# Altium PCB MAGI'sUART.PcbDoc
Units mil, origin at the board's own origin, x right, y up, seen from the top; angles counter-clockwise.
Board outline 6000 x 4000 mil, 2 copper layers (Top Layer, Bottom Layer); 19 components, 18 nets, 93 pads, 17 vias.
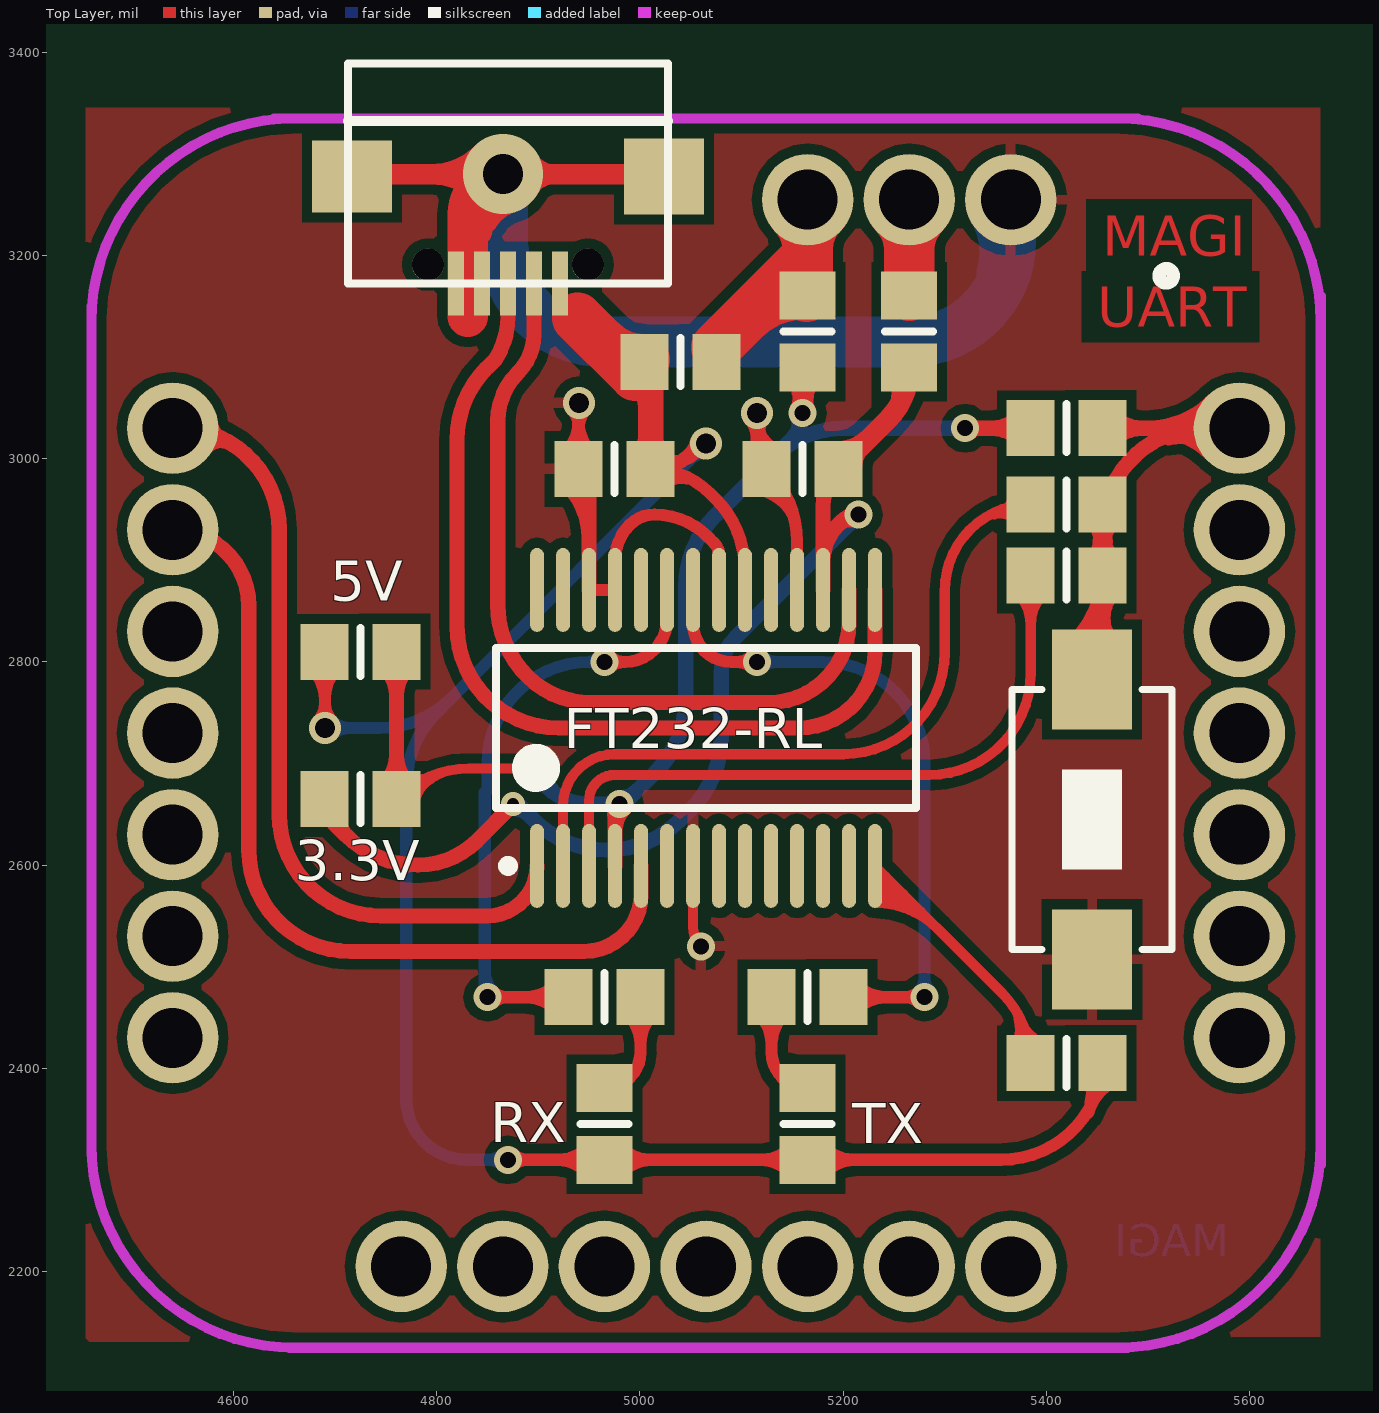
[diagram p0: Top Layer view]
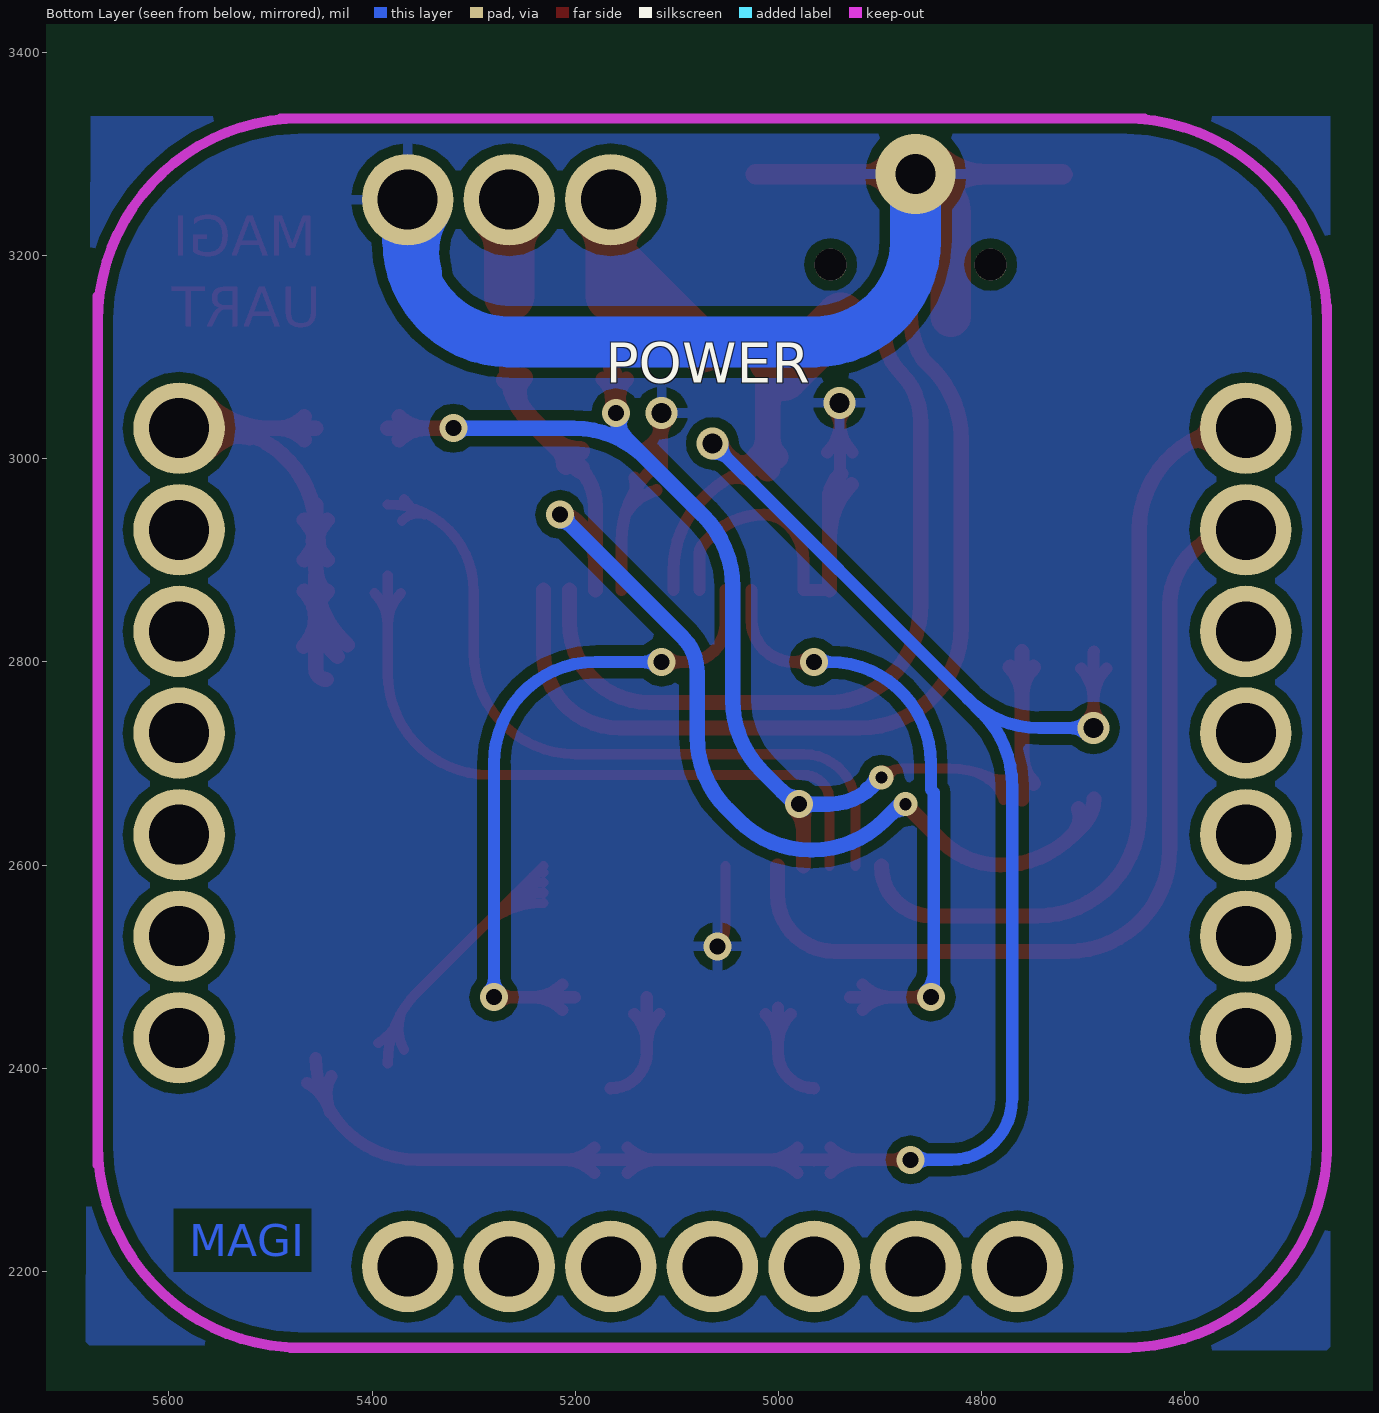
[diagram p1: Bottom Layer view, seen from below]

## Layer stack, top to bottom
Top Solder: solder mask 0.4, Solder Resist, Dk 3.5
Top Layer: signal copper 1.4
Dielectric1: dielectric 12.6, FR-4, Dk 4.8
Bottom Layer: signal copper 1.4
Bottom Solder: solder mask 0.4, Solder Resist, Dk 3.5

## Board outline
1000,1000 7000,1000 7000,5000 1000,5000

## Design rules (kind name [scope] priority, off if disabled: settings)
Clearance [All] p1: gap=10
PolygonConnect [All] p1: connectstyle=Relief reliefconductorwidth=10 reliefentries=4 polygonreliefangle="90 Angle" airgapwidth=10
RoutingVias [All] p1: holewidth=10 width=50 viastyle="Through Hole" minholewidth=1 minwidth=1 maxholewidth=280 maxwidth=500
SolderMaskExpansion [All] p1: expansion=4
Width [All] p1: maxlimit=50 minlimit=6 preferedwidth=20
29 further rules are at their usual default settings.

## Classes and differential pairs
component class MAGI'sCOM: C1 C2 C3 J2 LED1 LED2 R1 R2 R3 R4 R5 R6 R7 R8 R9 ""

## Components (designator, comment, footprint, x,y, rotation, side; value= is the part's Value field where it differs from the comment)
C1 "CAPACITOR POL" 6-0805_N 5160,2990 r180 top
C2 "CAPACITOR POL" 6-0805_N 4975,2990 r180 top
C3 "100nf" 6-0805_n 5420,2955 r0 top
J2 "MAGI-M8" MAGI-M8 5065,2730 r0 top
J3 "CON2" SW-1-SMD 5445,2645 r0 top
LED1 "LED_1" 6-0805_N 4965,2345 r90 top
LED2 "LED_1" 6-0805_N 5165,2345 r90 top
R1 "RES1" 6-0805_n 4965,2470 r0 top
R2 "RES1" 6-0805_n 5165,2470 r180 top
R3 "RES1" 6-0805_N 4725,2810 r180 top
R4 "RES1" 6-0805_N 4725,2665 r180 top
R5 "RES1" 6-0805_N 5420,2405 r0 top
R6 "10K" 6-0805_N 5420,3030 r180 top
R7 "10K" 6-0805_N 5040,3095 r180 top
R8 "0" 6-0805_N 5165,3125 r270 top
R9 "0" 6-0805_N 5265,3125 r270 top
R10 "100" 6-0805_N 5420,2885 r180 top
U1 "FT232RL-Tray" SSOP-28_N 5065,2735 r90 top
U2 "USB" MicroUSB 4870,3195 r0 top

## Footprints (in the part's own frame and the unit in brackets; to place one, negate y for a bottom-side part, rotate by r counter-clockwise, add the part's x,y. Pads: shape width x height; smd on the part's side, far side on the other; paste and mask are expansions set on the pad)
6-0805_N [mm] "Chip Resistor, Body 2.0x1.2mm, IPC Medium Density"
  rect 1.2x1.4 smd: 1(-0.9,0) 2(0.9,0)
  silkscreen extent 0,-0.6 0,0.6, body extent -1.07,-0.7 1.07,0.7, height 0.7
6-0805_n [mm] "Chip Resistor, Body 2.0x1.2mm, IPC Medium Density"
  rect 1.2x1.4 smd: 1(-0.9,0) 2(0.9,0)
  silkscreen extent 0,-0.6 0,0.6, body extent -1.07,-0.7 1.07,0.7, height 0.7
MAGI-M8 [mil]
  round 90 hole 59.06: 1(300,525) 2(200,525) 3(100,525) 8(-525,300) 9(-525,200) 10(-525,100) 11(-525,0) 12(-525,-100) 13(-525,-200) 14(-525,-300) 15(-300,-525) 16(-200,-525) 17(-100,-525) 18(0,-525) 19(100,-525) 20(200,-525) 21(300,-525) 22(525,-300) 23(525,-200) 24(525,-100) 25(525,0) 26(525,100) 27(525,200) 28(525,300)
  Keep-Out Layer lines w10: -605,-415 -605,290 -605,420 ; -605,-405 ccw(c-405,-405) -405,-605 ; -605,405 cw(c-405,405) -405,605 ; -425,605 425,605 ; -410,-605 415,-605 ; 405,-605 ccw(c405,-405) 605,-405 ; 405,605 cw(c405,405) 605,405 ; 605,-425 605,430
MicroUSB [mm]
  round 0.8 hole 0.8: 0(-2,-0.1) 0(2,-0.1)
  rect 0.4x1.6 smd: 1(1.3,-0.576) 2(0.65,-0.576) 3(0,-0.576) 4(-0.65,-0.576) 5(-1.3,-0.576)
  rect 2x1.8 smd: 6(-3.9,2.1)
  rect 2x1.9 smd: 7(3.9,2.1)
  silkscreen extent -4,-0.58 4,4.92, body extent -4.1,-0.68 4.1,5.02, height 3
SSOP-28_N [mm] "SOP, 28-Leads, Body 10.2x5.3mm, Pitch 0.65mm, IPC Medium Density"
  oval 2.1x0.35 smd: 1(-3.45,4.225) 2(-3.45,3.575) 3(-3.45,2.925) 4(-3.45,2.275) 5(-3.45,1.625) 6(-3.45,0.975) 7(-3.45,0.325) 8(-3.45,-0.325) 9(-3.45,-0.975) 10(-3.45,-1.625) 11(-3.45,-2.275) 12(-3.45,-2.925) 13(-3.45,-3.575) 14(-3.45,-4.225) 15(3.45,-4.225) 16(3.45,-3.575) 17(3.45,-2.925) 18(3.45,-2.275) 19(3.45,-1.625) 20(3.45,-0.975) 21(3.45,-0.325) 22(3.45,0.325) 23(3.45,0.975) 24(3.45,1.625) 25(3.45,2.275) 26(3.45,2.925) 27(3.45,3.575) 28(3.45,4.225)
  silkscreen extent -3.57,-5.25 2,5.25, body extent -2.8,-5.25 2.8,5.25, height 2
SW-1-SMD [mm]
  rect 2x2.5 smd: 1(0,3.5) 2(0,-3.5)
  silkscreen extent -2,-3.25 2,3.25

## Part data
C1 C2: "Capacitor"
C3: library part CAP_1, "Capacitor"
J3: "Connector"
R6 R7 R8 R9 R10: library part RES1
U1: "USB UART Asynchronous Serial Data Transfer Chip, SSOP-28, Tray"

## Via types
v1: diameter 27.56, hole 15.75, Top Layer to Bottom Layer, 10 vias
v2: diameter 31.5, hole 19.68, Top Layer to Bottom Layer, 4 vias
v3: diameter 23.62, hole 12, Top Layer to Bottom Layer, 1 vias
v4: diameter 24, hole 12, Top Layer to Bottom Layer, 1 vias
v5: diameter 78.74, hole 39.37, Top Layer to Bottom Layer, 1 vias

## Nets (pads, with @x,y where several pads share a name; then routed paths per layer and width w, separated by ;. In a path a pad name is that pad's centre, name@x,y a point inside that pad or via, vN(x,y) a via of type N, cw(c..) or ccw(c..) an arc to the next point about the centre after c; other vN are vias at no path point)
3V3: C1.1 R4.2 R9.2 U1.17 | length 1298
  Top Layer w15: R4.2 ccw(c4724.73,2665) 4699.87,2640.13 4710.71,2629.29 ; R4.2@4704.76,2655.66 ccw(c4728.61,2647.19) 4710.71,2629.29 ; v3(4875,2660) 4875.62,2660 4839.81,2624.18 cw(c4781.42,2682.57) 4781.42,2600 cw(c4781.42,2700) 4710.71,2629.29 ; U1.17 U1.17@5180.16,2899.17 ; C1.1 ccw(c5232.31,2953.12) 5180.16,2953.12 U1.17@5180.16,2899.17 ; v1@5211.76,2939.62 ccw(c5205.93,2929.93) 5197.93,2937.93 ; v1@5212.92,2939.08 ccw(c5207.2,2922.8) 5195,2935 ; v1(5215,2945) ccw(c5215,2920.86) 5197.93,2937.93 ; U1.17@5180.16,2899.17 cw(c5230.83,2899.17) 5195,2935 ; 5195,2935 5197.93,2937.93
  Top Layer w20: C1.1 5243.79,3038.35 ccw(c5192.57,3089.57) R9.2 ; C1.1@5195.43,3007.56 ccw(c5195.43,3049.95) 5225.41,3019.97 ; C1.1@5209.06,2993.94 cw(c5232.44,2993.94) C1.1@5215.9,3010.47 ; R9.2@5251.51,3079.85 cw(c5236.99,3065.08) 5257,3059.72 ; 5258.6,3065.68 cw(c5277.83,3060.53) R9.2@5267.87,3077.77
  Bottom Layer w15: v3@4875,2655.69 cw(c4875,2633.21) 4890.89,2649.11 ; v3(4875,2660) 4875.62,2660 4877.81,2662.19 4895.71,2644.29 ccw(c4966.42,2715) 4966.42,2615 4968.58,2615 ccw(c4968.58,2715) 5039.29,2644.29 5050.71,2655.71 ccw(c4980,2726.42) 5080,2726.42 5080,2790 cw(c5128.28,2790) 5094.14,2824.14 v1(5215,2945) ; v1@5208.72,2945 cw(c5193.56,2945) 5204.28,2934.28 cw(c5215,2923.56) v1@5215,2938.72
DTR: C3.1 U1.2 | length 764.4
  Top Layer w10: U1.2 4924.25,2658.42 cw(c4975,2658.42) 4975,2709.17 5200,2709.17 ccw(c5200,2809.17) 5300,2809.17 5300,2870.43 cw(c5384.57,2870.43) C3.1 ; 5348.65,2945.38 cw(c5354.28,2924.36) C3.1@5370.6,2938.75 ; 5349.03,2945.48 ccw(c5340.75,2976.36) C3.1@5368.44,2960.37
GND: C1.2 C2.2 J2.1 J3.2 U1.7 U1.18 U1.21 U1.25 U1.26 U2.4 | length 2655.4
  Top Layer w10: 4715.28,3280.32 ccw(c4720.59,3280.32) 4720.59,3275 ; v5@4841.38,3255.03 cw(c4820.03,3232.46) 4847.53,3218 ; 4843.23,3208.23 cw(c4915,3208.23) 4915,3280 ; v5@4848.25,3262.3 cw(c4829.45,3242.41) 4853.67,3229.68 ; 4853.27,3228.92 cw(c4886.28,3211.58) v5@4875.21,3247.18 ; 5022.36,3280 5022.36,3280.32 ; U1.7 5052.2,2538.82 ccw(c5078.82,2538.82) v1(5060,2520)
  Top Layer w12: C2.2@4927.11,3006.4 ccw(c4897.02,3036.48) 4939.57,3036.48 ccw(c4982.11,3036.48) C2.2@4952.03,3006.4 ; v2@4933.11,3048.11 cw(c4917.51,3032.51) 4939.57,3032.51 ; C2.2 4939.57,3053.95 cw(c4941.05,3053.95) v2(4940,3055) ; 4939.57,3030.42 cw(c4964.58,3030.42) v2@4946.89,3048.11 ; U1.26 U1.25 4975.43,2899.83 cw(c5025.17,2899.83) 4990,2935 cw(c5014.14,2910.86) 5014.14,2945 cw(c5014.14,2870.5) 5066.82,2923.18 5072.7,2917.3 cw(c5060.4,2905) 5077.8,2905 U1.21 ; v2@5108.11,3038.11 cw(c5092.51,3022.51) 5114.57,3022.51 ; v2@5110.13,3036.56 cw(c5101.75,3022.04) 5117.94,3026.38 ; 5114.57,3019.4 ccw(c5137.5,3019.4) C1.2@5127.11,2998.95 ; 5114.57,3020.42 cw(c5139.58,3020.42) v2@5121.89,3038.11 ; v2(5115,3045) 5118.54,3048.54 v2@5121.46,3048.54 ; 5118.08,3025.84 cw(c5129.68,3028.94) v2@5121.58,3037.81 ; C1.2@5120.01,2969.04 cw(c5107.03,2920.6) 5150.46,2945.67 ; C1.2@5132.55,3009.65 cw(c5147.44,3038.95) 5114.57,3038.95 5114.57,2990 5125.28,2989.29 cw(c5054.57,2918.58) 5154.57,2918.58 U1.18 ; C1.2@5141.59,2981.5 ccw(c5175.33,2972.46) 5145.08,2954.99
  Top Layer w15: C2.2@4928.17,2974.66 cw(c4875.84,2922.33) 4949.84,2922.33 ; C2.2@4938.77,2985.27 cw(c4912.05,2958.55) 4949.84,2958.55 ; U1.26 C2.2@4949.84,2965.19
  Top Layer w20: 4720.59,3280 v5(4865,3280) ; v5@4844.23,3259.23 ccw(c4794.09,3209.09) 4794.09,3280 ccw(c4794.09,3350.91) v5@4844.23,3300.77 ; v5@4890.65,3265.7 cw(c4915,3252.13) 4915,3280 ; v5@4890.65,3294.3 ccw(c4915,3307.87) 4915,3280 ; v5@4895,3280 4915,3280 ; 5022.36,3280 4915,3280
  Top Layer w40: 4830.43,3140 4830.43,3240.43 cw(c4865,3240.43) v5@4865,3275
  Bottom Layer w50: v5(4865,3280) 4865,3215 ccw(c4965,3215) 4965,3115 5265,3115 ccw(c5265,3215) 5365,3215 J2.1@5365,3250 ; J2.1@5347.76,3244.86 cw(c5277.35,3203.46) 5356.24,3182.32
NetJ2_2: J2.2 R9.1 | length 170.4
  Top Layer w50: J2.2@5250.86,3240.86 cw(c5216.72,3206.72) 5265,3206.72 cw(c5313.28,3206.72) J2.2@5279.14,3240.86 ; R9.1 J2.2
NetJ2_3: J2.3 R7.1 R8.1 | length 709.5
  Top Layer w50: R7.1@5075.22,3109.78 5165,3199.57 ; 5103.33,3137.9 cw(c5161.06,3080.16) R8.1@5161.06,3161.81 ; R8.1@5163.98,3159.51 cw(c5185.57,3179) 5165,3199.57 ; R8.1 5165,3199.57 ; 5165,3200 5165,3199.57 ; J2.3 5165,3199.57 ; J2.3@5150.86,3240.86 cw(c5116.72,3206.72) 5165,3206.72 ; J2.3@5150.86,3240.86 cw(c5116.72,3206.72) 5165,3206.72 ; J2.3@5150.86,3240.86 cw(c5116.72,3206.72) 5165,3206.72 ; J2.3@5150.86,3240.86 cw(c5116.72,3206.72) 5165,3206.72 ; J2.3@5150.86,3240.86 cw(c5116.72,3206.72) 5165,3206.72 ; 5165,3206.72 cw(c5213.28,3206.72) J2.3@5179.14,3240.86 ; 5165,3206.72 cw(c5213.28,3206.72) J2.3@5179.14,3240.86 ; 5165,3206.72 cw(c5213.28,3206.72) J2.3@5179.14,3240.86 ; 5165,3206.72 cw(c5213.28,3206.72) J2.3@5179.14,3240.86 ; 5165,3206.72 cw(c5213.28,3206.72) J2.3@5179.14,3240.86
NetLED1_2: LED1.2 R1.2 | length 166.6
  Top Layer w12: LED1.2 ccw(c4965,2415.87) 5000.43,2415.87 R1.2@5000.43,2460 ; R1.2@4987.97,2453.6 cw(c4957.89,2423.52) 5000.43,2423.52 cw(c5042.98,2423.52) R1.2@5012.89,2453.6
NetLED2_2: LED2.2 R2.2 | length 176.6
  Top Layer w12: R2.2@5117.11,2453.6 cw(c5087.02,2423.52) 5129.57,2423.52 cw(c5172.11,2423.52) R2.2@5142.03,2453.6 ; R2.2 5129.57,2415.87 ccw(c5165,2415.87) LED2.2
NetR1_1: R1.1 U1.23 | length 766.9
  Top Layer w12: v1(4850,2470) R1.1 ; v1@4855.5,2464.5 cw(c4868.78,2451.22) 4868.78,2470 cw(c4868.78,2488.78) v1@4855.5,2475.5 ; R1.1@4917.11,2457.54 ccw(c4887.02,2427.46) 4887.02,2470 ccw(c4887.02,2512.54) R1.1@4917.11,2482.46 ; v1(4965,2800) 4985,2800 ccw(c4985,2841.61) 5026.61,2841.61 U1.23 ; v1@4970.5,2794.5 cw(c4983.78,2781.22) 4983.78,2800 cw(c4983.78,2818.78) v1@4970.5,2805.5
  Bottom Layer w12: 4847.19,2495.57 ccw(c4875.57,2495.57) v1@4855.5,2475.5 ; v1(4850,2470) 4847.19,2472.81 4847.19,2671.52 4850,2674.33 4850,2700 cw(c4950,2700) 4950,2800 ; v1@4958.64,2795.52 ccw(c4950,2789.43) 4950,2800 ; v1@4958.64,2804.48 cw(c4950,2810.57) 4950,2800 ; v1(4965,2800) 4950,2800
NetR2_1: R2.1 U1.22 | length 833.9
  Top Layer w12: U1.22 5052.2,2837.8 ccw(c5090,2837.8) 5090,2800 v1(5115,2800) ; v1@5109.5,2794.5 ccw(c5096.22,2781.22) 5096.22,2800 ccw(c5096.22,2818.78) v1@5109.5,2805.5 ; R2.1 v1(5280,2470) ; R2.1@5212.89,2457.54 cw(c5242.98,2427.46) 5242.98,2470 cw(c5242.98,2512.54) R2.1@5212.89,2482.46 ; v1@5274.5,2464.5 ccw(c5261.22,2451.22) 5261.22,2470 ccw(c5261.22,2488.78) v1@5274.5,2475.5
  Bottom Layer w12: v1(5115,2800) 5180,2800 cw(c5180,2700) 5280,2700 v1(5280,2470) ; v1@5120.5,2794.5 cw(c5133.78,2781.22) 5133.78,2800 cw(c5133.78,2818.78) v1@5120.5,2805.5 ; v1@5274.5,2475.5 ccw(c5261.22,2488.78) 5280,2488.78 ccw(c5298.78,2488.78) v1@5285.5,2475.5
NetR5_1: R5.1 U1.14 | length 485.9
  Top Layer w10: U1.14@5231.34,2562.83 cw(c5231.34,2475.11) 5293.37,2537.14 ; U1.14@5231.34,2572.83 cw(c5231.34,2509.25) 5276.3,2554.21 ; U1.14@5231.34,2582.83 cw(c5231.34,2543.39) 5259.23,2571.28 ; U1.14@5231.34,2592.83 cw(c5231.34,2577.53) 5242.16,2588.35 ; U1.14 5355.61,2474.9 cw(c5285.72,2405) R5.1 ; R5.1@5368.44,2418.25 ccw(c5332.52,2438.99) 5372.58,2449.72 ; 5371.31,2454.48 ccw(c5418.1,2467.01) R5.1@5393.88,2425.06
NetR10_2: R10.2 U1.3 | length 737.5
  Top Layer w10: U1.3 4949.84,2663.62 cw(c4975,2663.62) 4975,2688.78 5284.57,2688.78 ccw(c5284.57,2788.78) 5384.57,2788.78 R10.2 ; R10.2@5371.4,2867.9 cw(c5339.61,2836.11) 5384.57,2836.11 cw(c5429.52,2836.11) R10.2@5397.73,2867.9
NetU1_15: U1.15 U2.3 | length 918.1
  Top Layer w15: U2.3@4870,3167.34 4870,3140.17 cw(c4789.83,3140.17) 4858.16,3098.23 4849.29,3089.36 ccw(c4920,3018.65) 4820,3018.65 4820,2835 ccw(c4920,2835) 4920,2735 5156.34,2735 ccw(c5156.34,2810) 5231.34,2810 U1.15
NetU1_16: U1.16 U2.2 | length 799.2
  Top Layer w15: U2.2@4895.59,3167.34 4895.59,3122.64 cw(c4842.36,3122.64) 4880,3085 ccw(c4928.28,3036.72) 4860,3036.72 4860,2856.42 ccw(c4960,2856.42) 4889.29,2785.71 ccw(c4951.36,2847.78) 4951.36,2760 5126.72,2760 ccw(c5126.72,2839.03) 5205.75,2839.03 U1.16
RST: C3.2 J2.28 J3.1 R6.1 R10.1 | length 1323.3
  Top Layer w15: J3.1@5424.18,2816.77 ccw(c5365.33,2885) R10.1 5455.43,2793.23 cw(c5445,2793.23) J3.1 ; J3.1@5433.98,2805.41 ccw(c5393.58,2852.25) 5455.43,2852.25 ; R10.1@5444.03,2869.66 cw(c5416.51,2842.14) 5455.43,2842.14 cw(c5494.35,2842.14) R10.1@5466.83,2869.66 ; R10.1@5444.03,2900.34 ccw(c5416.51,2927.86) 5455.43,2927.86 ccw(c5494.35,2927.86) R10.1@5466.83,2900.34 ; C3.2@5444.03,2939.66 cw(c5416.51,2912.14) 5455.43,2912.14 cw(c5494.36,2912.14) C3.2@5466.83,2939.66 ; R10.1@5445,2867.8 ccw(c5419.81,2892.98) 5455.43,2892.98 C3.2@5455.43,2930 ; C3.2@5445.97,2938.01 cw(c5435.23,2923.19) 5452.91,2918.45 ; C3.2@5447.37,2937.1 cw(c5438.16,2921.15) 5455.95,2925.92 ; 5454.91,2925.92 cw(c5472.7,2921.15) C3.2@5463.49,2937.1 ; 5455.43,2844.39 ccw(c5496.75,2844.39) J3.1@5467.54,2815.17 ; C3.2 C3.2@5455.43,2930 ; R6.1 J2.28@5555.43,3030 ; 5457.95,2918.45 cw(c5475.64,2923.19) C3.2@5464.89,2938.01 ; R6.1@5466.83,3018.6 cw(c5494.36,2991.08) 5494.36,3030 cw(c5494.35,3068.92) R6.1@5466.83,3041.4 ; 5520.4,3020.61 cw(c5530.23,2983.95) J2.28@5560.29,3007.12 ; 5521.1,3020.8 ccw(c5505.57,3078.74) J2.28@5557.52,3048.75 ; 5542.13,3026.44 cw(c5549.53,2998.83) J2.28@5572.18,3016.27 ; J2.28@5563.48,3003.48 ccw(c5499.47,2939.47) 5499.47,3030 ccw(c5499.47,3120.53) J2.28@5563.48,3056.52 ; J2.28@5574.09,3014.09 ccw(c5535.68,2975.68) 5535.68,3030 ccw(c5535.68,3084.32) J2.28@5574.09,3045.91 ; J2.28 J2.28@5555.43,3030 ; C3.2@5455.43,2930 cw(c5555.43,2930) J2.28@5555.43,3030
RXD: J2.9 U1.5 | length 860.9
  Top Layer w15: J2.9 cw(c4540,2855) 4615,2855 4615,2615.06 ccw(c4715,2615.06) 4715,2515.06 4945,2515.06 ccw(c4945,2571.08) 5001.02,2571.08 U1.5
TXD: J2.8 U1.1 | length 830.8
  Top Layer w15: J2.8 4545,3030 cw(c4545,2930) 4645,2930 4645,2650 ccw(c4745,2650) 4745,2550 4849.49,2550 ccw(c4849.49,2599.17) U1.1 ; J2.8@4571.1,3009.05 cw(c4587.66,2997.89) 4592.83,3017.18 cw(c4598.37,3037.85) J2.8@4577.17,3035
VCC: C2.1 LED1.1 LED2.1 R3.2 R5.2 R7.2 U1.20 U2.1 | length 2981.5
  Top Layer w12: R3.2@4677.11,2793.6 cw(c4645.98,2762.47) 4690,2762.47 ; v2@4683.11,2741.89 ccw(c4666.47,2758.53) 4690,2758.53 ccw(c4713.53,2758.53) v2@4696.89,2741.89 ; R3.2 cw(c4688.52,2808.95) 4690,2808.95 v2(4690,2735) ; 4690,2764.57 cw(c4731.06,2764.57) R3.2@4702.03,2793.6 ; v1(4870,2310) LED1.1@4965,2310 ; v1@4875.5,2304.5 cw(c4888.78,2291.22) 4888.78,2310 cw(c4888.78,2328.78) v1@4875.5,2315.5 ; 4917.47,2310 cw(c4917.47,2265.98) LED1.1@4948.6,2297.11 ; 4919.56,2310 ccw(c4919.56,2351.06) LED1.1@4948.6,2322.03 ; LED1.1 LED1.1@4965,2310 ; LED1.1@4981.4,2297.11 cw(c5012.53,2265.98) 5012.53,2310 ; LED1.1@4981.4,2322.03 ccw(c5010.43,2351.06) 5010.43,2310 ; C2.1@5023.34,2974.07 cw(c5039.93,2958.64) 5045.8,2980.52 ; C2.1@5025.26,3003.46 ccw(c5036.35,3010.59) 5039.76,2997.86 ccw(c5045.05,2978.12) C2.1@5026.46,2986.61 ; C2.1@5025.69,2994.87 ccw(c5051.29,3009.65) 5043.64,2981.1 ; 5042.24,3000.13 ccw(c5027.91,3024.94) v2@5055.58,3017.52 ; 5048.5,3003.74 cw(c5057.71,2987.79) v2@5062.48,3005.58 ; v2(5065,3015) 5060.91,3010.91 cw(c5010.43,3061.38) C2.1 cw(c5010.43,2906.55) 5069.44,2965.56 5074.1,2960.9 cw(c5003.39,2890.19) 5103.39,2890.19 U1.20 ; 5117.47,2310 cw(c5117.47,2265.98) LED2.1@5148.6,2297.11 ; 5119.56,2310 ccw(c5119.56,2351.06) LED2.1@5148.6,2322.03 ; LED2.1@5181.4,2297.11 cw(c5212.53,2265.98) 5212.53,2310 ; LED2.1@5181.4,2322.03 ccw(c5210.43,2351.06) 5210.43,2310 ; R5.2@5440.17,2392.25 cw(c5410.17,2374.93) 5443.63,2365.96 ; 5441,2356.13 cw(c5487.43,2343.69) R5.2@5464.02,2385.67 ; R5.2@5455.43,2410 cw(c5355.43,2410) 5355.43,2310 LED1.1@4965,2310
  Top Layer w25: R7.2@4996.7,3083.2 cw(c4963.55,3050.05) 5010.43,3050.05 ; C2.1@5002.57,3001.8 ccw(c4983.58,3020.79) 5010.43,3020.79 ccw(c5037.28,3020.79) C2.1@5018.3,3001.8 ; R7.2 cw(c4990.4,3080.84) 5010.43,3080.84 C2.1
  Top Layer w50: 4938.64,3138.64 R7.2@4995.57,3081.71 ; 4962.16,3115.13 ccw(c5004.57,3157.53) R7.2@5004.57,3097.56
  Bottom Layer w12: v2(4690,2735) 4743.58,2735 ccw(c4743.58,2835) 4814.29,2764.29 ; v2@4696.89,2728.11 cw(c4713.53,2711.47) 4713.53,2735 cw(c4713.53,2758.53) v2@4696.89,2741.89 ; v1@4864.5,2304.5 ccw(c4851.22,2291.22) 4851.22,2310 ccw(c4851.22,2328.78) v1@4864.5,2315.5 ; v1(4870,2310) 4830,2310 cw(c4830,2370) 4770,2370 4770,2678.58 cw(c4870,2678.58) 4799.29,2749.29 4814.29,2764.29 ; v2@5055.25,3015 cw(c5031.72,3015) 5048.36,2998.36 cw(c5065,2981.72) v2@5065,3005.25 ; v2(5065,3015) 4814.29,2764.29
VCCIO: R3.1 R4.1 R6.2 R8.2 U1.4 | length 1760
  Top Layer w10: R4.1 4761.14,2665.71 cw(c4831.85,2595) 4831.85,2695 4877.66,2695 cw(c4877.66,2665.21) v4(4898.73,2686.27) ; R4.1@4763.09,2677.14 ccw(c4771.42,2702.83) 4784.93,2679.44 ; R4.1@4766.18,2686.65 ccw(c4780.75,2731.63) 4804.4,2690.68 ; R4.1@4778.42,2664.12 cw(c4811.46,2655.26) 4794.36,2684.89 ; v4@4891.86,2684.92 ccw(c4878.63,2682.31) 4885.37,2693.98 ccw(c4892.11,2705.66) v4@4896.47,2692.9
  Top Layer w15: R4.1@4749.03,2680.34 ccw(c4721.51,2707.86) 4760.43,2707.86 ccw(c4799.35,2707.86) R4.1@4771.83,2680.34 ; R3.1@4749.03,2794.66 cw(c4721.51,2767.14) 4760.43,2767.14 cw(c4799.35,2767.14) R3.1@4771.83,2794.66 ; R4.1 R3.1 ; U1.4 4975.43,2648.95 ccw(c4973.95,2648.95) 4975,2650 4975,2655 v1(4980,2660) ; U1.4@4975.43,2633.81 cw(c5006.19,2633.81) v1@4984.44,2655.56 ; R8.2@5149.66,3078.17 cw(c5124.71,3053.21) v1@5160,3053.21 ; v1@5154.56,3048.14 ccw(c5135.15,3059.35) 5156.8,3065.15 ; v1@5155.56,3049.44 ccw(c5144.84,3060.16) 5160,3060.16 ccw(c5175.16,3060.16) v1@5164.44,3049.44 ; v1(5160,3045) 5160,3077.5 cw(c5177.07,3077.5) R8.2 ; v1@5160,3048.08 cw(c5202.55,3048.08) R8.2@5172.46,3078.17 ; 5163.65,3061.71 ccw(c5180.92,3057.08) v1@5165.44,3048.14 ; v1(5320,3030) R6.2 ; v1@5324.44,3025.56 cw(c5335.16,3014.84) 5335.16,3030 cw(c5335.16,3045.16) v1@5324.44,3034.44 ; R6.2@5373.17,3018.6 ccw(c5345.64,2991.08) 5345.64,3030 ccw(c5345.65,3068.92) R6.2@5373.17,3041.4
  Bottom Layer w15: v4@4903.07,2687.44 ccw(c4923.51,2692.92) 4912.93,2674.59 ; v4@4906.97,2678.03 ccw(c4950.5,2721.57) 4950.5,2660 v1(4980,2660) ; v1@4975.56,2655.56 ccw(c4964.84,2644.84) 4964.84,2660 ccw(c4964.84,2675.16) v1@4975.56,2664.44 ; v1@4980,2666.28 ccw(c4980,2690.7) 4997.27,2673.43 ; v1@4981.92,2658.08 5015.71,2691.87 ccw(c4945,2762.59) 5045,2762.59 5045,2873.58 cw(c5145,2873.58) 5074.29,2944.29 5130.71,3000.71 ; v1@5154.56,3041.86 cw(c5141.43,3034.28) 5156.08,3030.36 cw(c5170.72,3026.43) v1@5163.14,3039.56 ; v1(5160,3045) cw(c5123.79,3045) 5149.39,3019.39 5130.71,3000.71 ; v1@5315.56,3025.56 ccw(c5304.84,3014.84) 5304.84,3030 ccw(c5304.84,3045.16) v1@5315.56,3034.44 ; v1(5320,3030) 5201.42,3030 ccw(c5201.42,2930) 5130.71,3000.71
pads on no net: J2.10 J2.11 J2.12 J2.13 J2.14 J2.15 J2.16 J2.17 J2.18 J2.19 J2.20 J2.21 J2.22 J2.23 J2.24 J2.25 J2.26 J2.27 U1.6 U1.8 U1.9 U1.10 U1.11 U1.12 U1.13 U1.19 U1.24 U1.27 U1.28 U2.0 U2.5 U2.6 U2.7

## Polygon pours and split planes (outlines as drawn)
GND on Top Layer "Keep-Out Layer-No Net" (solid, pour order 2): 4454.37,3345.69 4454.37,2130.69 5669.37,2135.69 5669.37,3345.69
GND on Bottom Layer "Keep-Out Layer-No Net" (solid, pour order 4): 4456.96,3337.26 5676.94,3337.26 5681.96,2127.26 4456.96,2122.26

## Other copper
Top Layer:
  text "MAGI" at 5455,3200 h39.37
  text "UART" at 5450,3130 h39.37
Bottom Layer:
  text "MAGI" at 5580,2215 h31.5

## Silkscreen, mask and mechanical layers (free items; w line width, h text height)
Top Overlay:
  circle w13: c5517.93,3180 r7.07
  text "5V" at 4695,2860 h39.37
  text "FT232-RL" at 4925,2715 h39.37
  text "3.3V" at 4660,2585 h39.37
  text "RX" at 4852.86,2327.14 h39.37
  text "TX" at 5208.95,2326.31 h39.37
Bottom Overlay:
  text "POWER" at 5170,3075 h39.37